# Altium PCB MyPCB1_lab11.PcbDoc
Units mm, origin at the board's own origin, x right, y up, seen from the top; angles counter-clockwise.
Board outline 184 x 67 mm, 6 copper layers (Top Layer, Layer 3, Layer 1, Layer 2, Layer 4, Bottom Layer), stack 1.612 mm thick; 50 components, 66 nets, 239 pads, 208 vias.
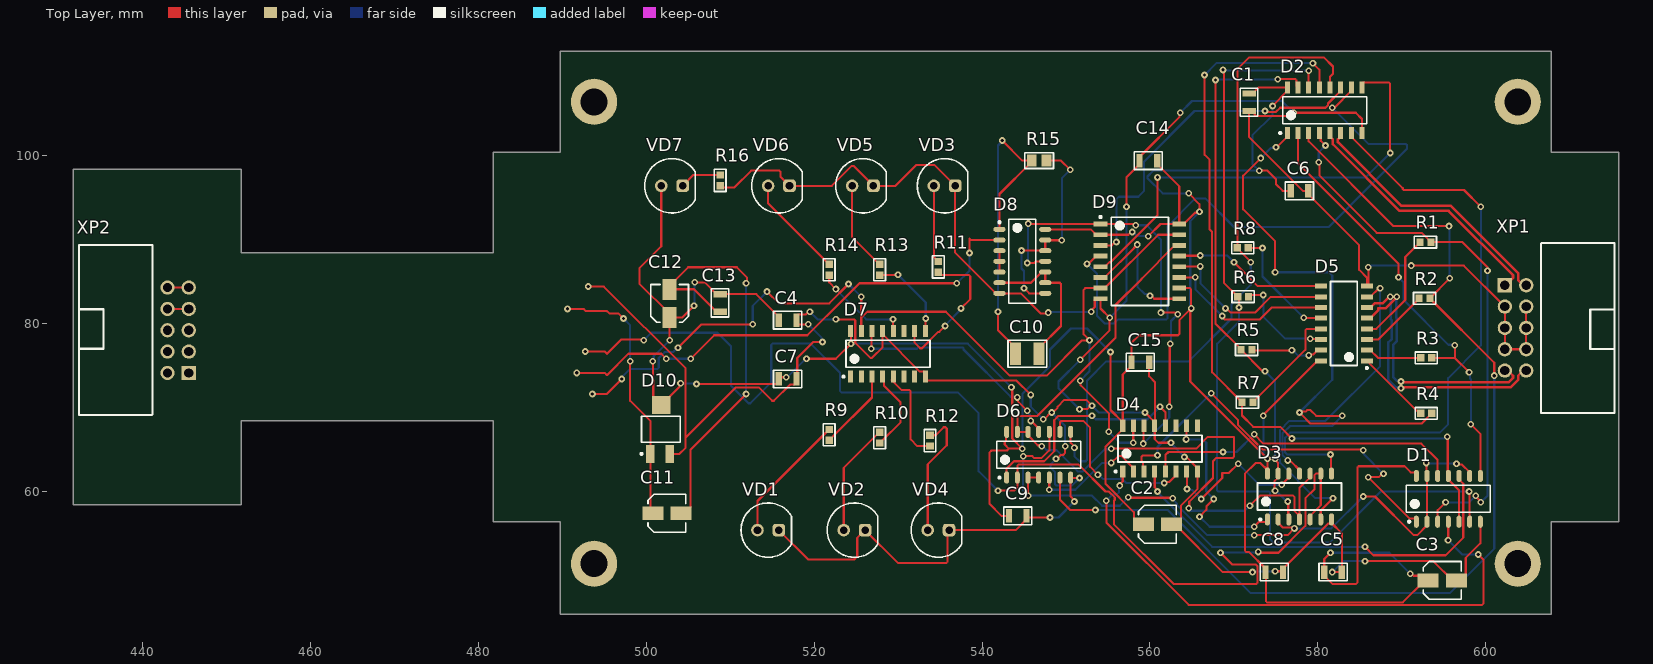
[diagram p0: Top Layer view]
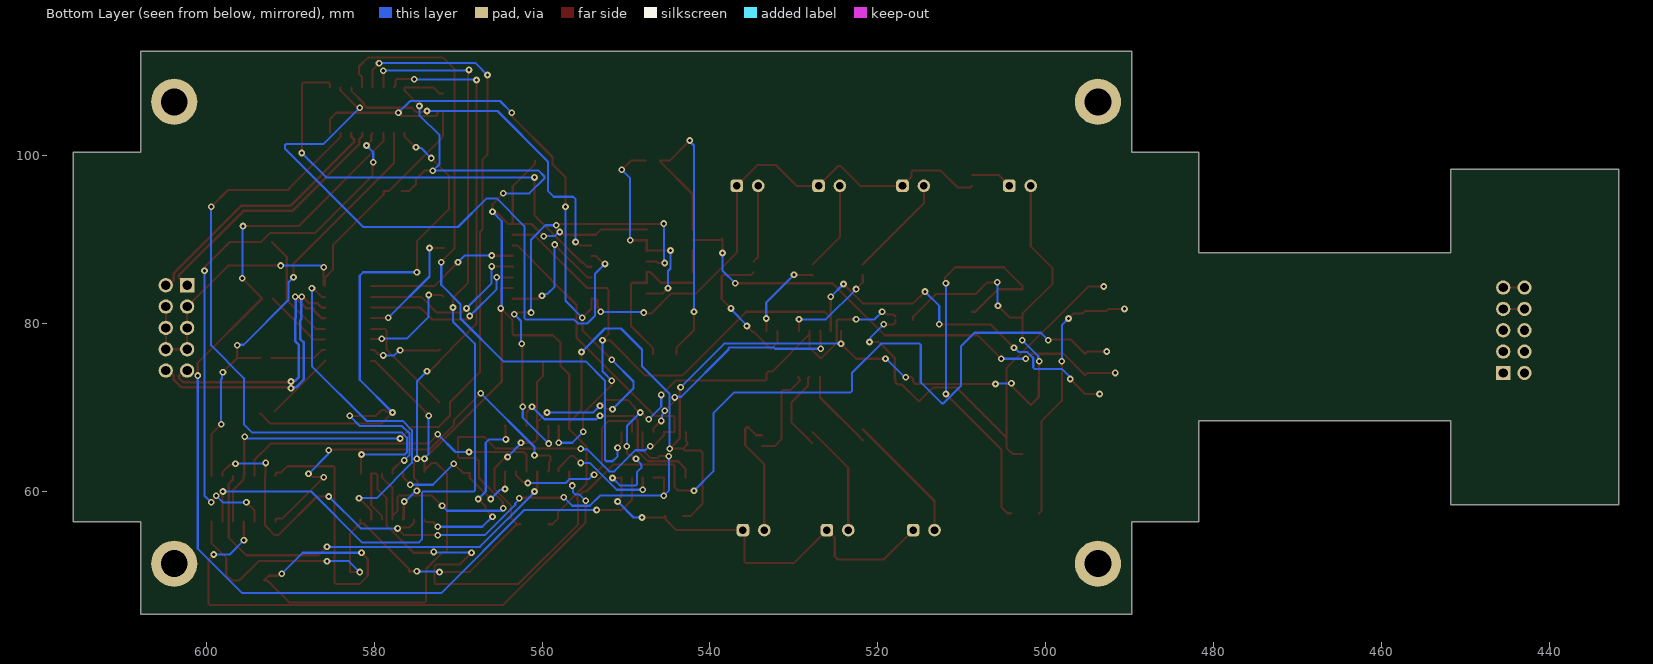
[diagram p1: Bottom Layer view, seen from below]
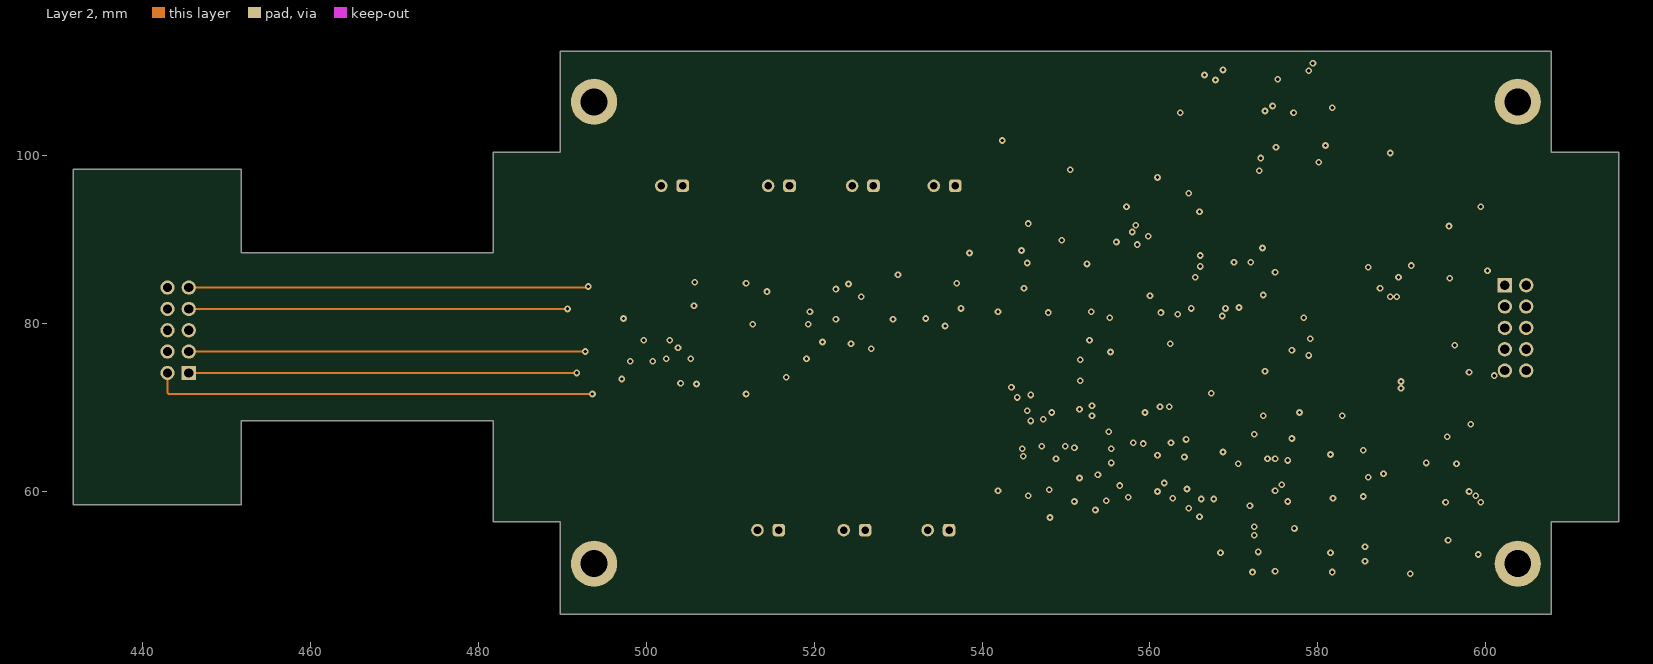
[diagram p2: Layer 2]
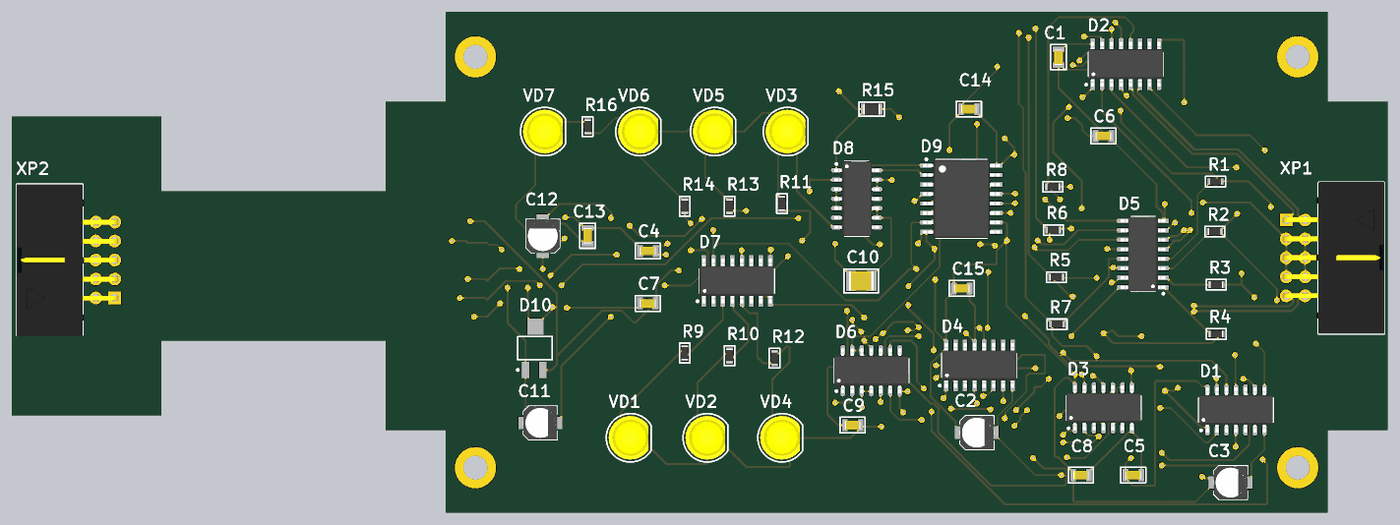
[diagram p3: 3D render of the assembled board from above, using the file's embedded part models]

## Layer stack, top to bottom
Top Solder: solder mask 0.0102, Solder Resist, Dk 3.5
Top Layer: signal copper 0.018
Dielectric 4: prepreg 0.508, PP-006, Dk 4.1
Layer 3: signal copper 0.018
Dielectric 6: prepreg 0.0711, PP-006, Dk 4.1
Dielectric 2: prepreg 0.0711, PP-006, Dk 4.1
Layer 1: signal copper 0.018
Dielectric 1: core 0.2032, Core-025, Dk 4.6
Layer 2: signal copper 0.018
Dielectric 3: prepreg 0.0711, PP-006, Dk 4.1
Dielectric 7: prepreg 0.0711, PP-006, Dk 4.1
Layer 4: signal copper 0.018
Dielectric 5: prepreg 0.508, PP-006, Dk 4.1
Bottom Layer: signal copper 0.018
Bottom Solder: solder mask 0.0102, Solder Resist, Dk 3.5

## Board outline
451.8,88.4 451.8,98.4 431.8,98.4 431.8,58.4 451.8,58.4 451.8,68.4 481.8,68.4 481.8,56.4 489.8,56.4 489.8,45.4 607.8,45.4 607.8,56.4 615.8,56.4 615.8,100.4 607.8,100.4 607.8,112.4 489.8,112.4 489.8,100.4 481.8,100.4 481.8,88.4
board region "Layer Stack Region 1": 481.8,68.4 451.8,68.4 451.8,88.4 481.8,88.4
board region "Layer Stack Region 1": 451.8,58.4 431.8,58.4 431.8,98.4 451.8,98.4
board region "Layer Stack Region 1": 481.8,100.4 489.8,100.4 489.8,112.4 607.8,112.4 607.8,100.4 615.8,100.4 615.8,56.4 607.8,56.4 607.8,45.4 489.8,45.4 489.8,56.4 481.8,56.4

## Design rules (kind name [scope] priority, off if disabled: settings)
Clearance [InNet('No Net')] p1: gap=0.2 ignorepadtopadclearanceinfootprint=FALSE
DiffPairsRouting [All] p1: maxlimit=0.4 minlimit=0.2 mostfreqgap=0.3 toplayer_minwidth=0.2 toplayer_maxwidth=0.381 toplayer_prefwidth=0.3 midlayer1_maxgap=0.254 midlayer1_minwidth=0.2 midlayer1_maxwidth=0.381 midlayer1_prefwidth=0.3 midlayer2_maxgap=0.254 midlayer2_minwidth=0.2 midlayer2_maxwidth=0.381 midlayer2_prefwidth=0.3 midlayer3_maxgap=0.254 midlayer3_minwidth=0.2 midlayer3_maxwidth=0.381 midlayer3_prefwidth=0.3 midlayer4_maxgap=0.254 midlayer4_minwidth=0.2 midlayer4_maxwidth=0.381 midlayer4_prefwidth=0.3 bottomlayer_minwidth=0.2 bottomlayer_maxwidth=0.381 bottomlayer_prefwidth=0.3 maxuncoupledlength=12.7
PolygonConnect [All] p1: connectstyle=Relief reliefconductorwidth=0.254 reliefentries=4 polygonreliefangle="90 Angle" airgapwidth=0.254
RoutingVias [All] p1: holewidth=0.4 width=0.8 viastyle="Through Hole" minholewidth=0.3 minwidth=0.6 maxholewidth=0.9 maxwidth=1.27
SolderMaskExpansion [All] p1: expansion=0.102
Width [All] p1: maxlimit=1 minlimit=0.2 preferedwidth=0.25
29 further rules are at their usual default settings.

## Classes and differential pairs
net class S[0..5]: S0 S1 S2 S3 S4 S5
net class ABC[0..7]: ABC0 ABC1 ABC2 ABC3 ABC4 ABC5 ABC6 ABC7
component class ivt33_kuznecov_list2_9var: C10 C11 C12 C13 C14 C15 D8 D9 D10 R15 R16 VD7 XP2
component class ivt33_kuznecov_list1_9var: C1 C2 C3 C4 C5 C6 C7 C8 C9 D1 D2 D5 D7 R1 R2 R3 R4 R5 R6 R7 R8 R9 R10 R11 R12 R13 R14 VD1 VD2 VD3 VD4 VD5 VD6 XP1
differential pair Out2: +Out2_P -Out2_N
differential pair Out1: +Out1_P -Out1_N

## Components (designator, comment, footprint, x,y, rotation, side; value= is the part's Value field where it differs from the comment)
C1 "" 0805_N 571.8,106.35 r90 top
C2 "*" CA010M0010REB-0405 560.875,56.1 r0 top
C3 "*" CA010M0010REB-0405 594.8,49.4 r0 top
C4 "" 0805_N 516.85,80.4 r180 top
C5 "" 0805_N 581.8,50.4 r0 top
C6 "" 0805_N 577.8,95.8 r180 top
C7 "" 0805_N 516.85,73.4 r180 top
C8 "" 0805_N 574.8,50.4 r0 top
C9 "" 0805_N 544.25,57.1 r180 top
C10 "1210" K10-79_3.2_2.5(1210) 545.4,76.4 r0 top
C11 "*" CA010M0010REB-0405 502.475,57.4 r0 top
C12 "*" CA010M0010REB-0405 502.8,82.4 r90 top
C13 "" 0805_N 508.8,82.45 r90 top
C14 "" 0805_N 559.8,99.4 r0 top
C15 "" 0805_N 558.85,75.4 r180 top
D1 "74AC00SC" SO14-N 595.53,59.125 r90 top
D2 "SOIC-16" SO16-N 580.8,105.4 r90 top
D3 "74AC00SC" SO14-N 577.8,59.4 r90 top
D4 "SOIC-16" SO16-N 561.2,65.1 r90 top
D5 "SOIC-16" SO16-N 583.1,80 r180 top
D6 "74AC00SC" SO14-N 546.74,64.375 r90 top
D7 "SOIC-16" SO16-N 528.8,76.4 r90 top
D8 "74AC00SC" SO14-N 544.8,87.4 r0 top
D9 "MC14520BDWG \"Motorola\"" SOIC-16W-N 558.8,87.4 r0 top
D10 "LM1117DTX" LM1117DTX 502.8,67.4 r90 top
R1 "Р1-12-0,1 * 5%-M-\"A\" АЛЯР.434110.005 ТУ" RES_0603_1608_N 592.8,89.7 r180 top
R2 "Р1-12-0,1 * 5%-M-\"A\" АЛЯР.434110.005 ТУ" RES_0603_1608_N 592.7,83 r180 top
R3 "Р1-12-0,1 * 5%-M-\"A\" АЛЯР.434110.005 ТУ" RES_0603_1608_N 592.9,75.9 r180 top
R4 "Р1-12-0,1 * 5%-M-\"A\" АЛЯР.434110.005 ТУ" RES_0603_1608_N 592.9,69.3 r180 top
R5 "Р1-12-0,1 * 5%-M-\"A\" АЛЯР.434110.005 ТУ" RES_0603_1608_N 571.5,76.9 r0 top
R6 "Р1-12-0,1 * 5%-M-\"A\" АЛЯР.434110.005 ТУ" RES_0603_1608_N 571.1,83.2 r0 top
R7 "Р1-12-0,1 * 5%-M-\"A\" АЛЯР.434110.005 ТУ" RES_0603_1608_N 571.6,70.6 r0 top
R8 "Р1-12-0,1 * 5%-M-\"A\" АЛЯР.434110.005 ТУ" RES_0603_1608_N 571.05,89 r0 top
R9 "Р1-12-0,1 * 5%-M-\"A\" АЛЯР.434110.005 ТУ" RES_0603_1608_N 521.8,66.75 r90 top
R10 "Р1-12-0,1 * 5%-M-\"A\" АЛЯР.434110.005 ТУ" RES_0603_1608_N 527.8,66.4 r90 top
R11 "Р1-12-0,1 * 5%-M-\"A\" АЛЯР.434110.005 ТУ" RES_0603_1608_N 534.8,86.75 r90 top
R12 "Р1-12-0,1 * 5%-M-\"A\" АЛЯР.434110.005 ТУ" RES_0603_1608_N 533.8,66.05 r90 top
R13 "Р1-12-0,1 * 5%-M-\"A\" АЛЯР.434110.005 ТУ" RES_0603_1608_N 527.8,86.4 r90 top
R14 "Р1-12-0,1 * 5%-M-\"A\" АЛЯР.434110.005 ТУ" RES_0603_1608_N 521.8,86.4 r90 top
R15 "0805" RES_0805_2012_N 546.8,99.4 r0 top
R16 "Р1-12-0,1 * 5%-M-\"A\" АЛЯР.434110.005 ТУ" RES_0603_1608_N 508.8,97.05 r90 top
VD1 "*" LED_5mm 514.53,55.4 r0 top
VD2 "*" LED_5mm 524.8,55.4 r0 top
VD3 "*" LED_5mm 535.53,96.4 r0 top
VD4 "*" LED_5mm 534.8,55.4 r0 top
VD5 "*" LED_5mm 525.8,96.4 r0 top
VD6 "*" LED_5mm 515.8,96.4 r0 top
VD7 "*" LED_5mm 503.07,96.4 r0 top
XP1 "TE_1-1634689-0" BH-10R 603.53,79.48 r180 top
XP2 "TE_1-1634689-0" BH-10R 444.27,79.2 r0 top

## Footprints (in the part's own frame and the unit in brackets; to place one, negate y for a bottom-side part, rotate by r counter-clockwise, add the part's x,y. Pads: shape width x height; smd on the part's side, far side on the other; paste and mask are expansions set on the pad)
0805_N [mm] "Резистор, конденсатор"
  rect 0.75x1.6 smd: 1(-1.05,0) 2(1.05,0)
  silkscreen extent -1.68,-1.05 1.68,1.05, body extent -1.05,-0.58 1.05,0.58, height 1
BH-10R [mm] "Разъем угловой 2х5х2,54 типа ВН"
  rect 1.7x1.7 hole 1.1: 1(1.27,-5.08)
  round 1.7 hole 1.1: 2(-1.27,-5.08) 3(1.27,-2.54) 4(-1.27,-2.54) 5(1.27,0) 6(-1.27,0) 7(1.27,2.54) 8(-1.27,2.54) 9(1.27,5.08) 10(-1.27,5.08)
  silkscreen extent -11.8,-10.1 -3.05,10.15, body extent -11.85,-10.2 1.65,10.15, height 9.13
CA010M0010REB-0405 [mm] "Aluminum Electrolytic Capacitor, Body 4,30x4,30x6,30mm, IPC Medium Density"
  rect 2.5x1.65 smd: +(-1.675,0) -(1.675,0)
  silkscreen extent -2.25,-2.25 2.25,2.25, body extent -2.3,-2.25 2.3,2.25, height 6.3
K10-79_3.2_2.5(1210) [mm]
  rect 1.3x2.7 smd: 1(-1.4,0) 2(1.4,0)
  silkscreen extent -2.3,-1.6 2.3,1.6, body extent -1.65,-1.3 1.65,1.3, height 1.75
LED_5mm [mm]
  round 1.5 hole 0.9: A(-1.27,0)
  rrect50% 1.5x1.5 hole 0.9: C(1.27,0)
  silkscreen extent -3.24,-3.24 2.78,3.24, body extent -2.92,-2.92 2.41,2.92, height 10.71
LM1117DTX [mm] "SOT223, 4-Leads, Body 6,50x7,00mm (avg), Pitch 2,30mm, IPC Medium Density"
  rect 2.15x1 smd: 1(-2.925,2.3) 3(-2.925,0)
  rect 2.15x2.15 smd: 4(2.9,1)
  silkscreen extent -3.05,-1.27 1.55,3.47, body extent -1.85,-1.27 1.85,3.35, height 1.8
RES_0603_1608_N [mm] "Chip Resistor, 2-Leads, Body 1,60x0,80mm, IPC Medium Density"
  rect 0.85x0.9 smd: 1(-0.65,0) 2(0.65,0)
  silkscreen extent -1.33,-0.7 1.33,0.7, body extent -0.87,-0.45 0.87,0.45, height 0.55
RES_0805_2012_N [mm] "Rezistor 0805"
  rect 1.15x1.4 smd: 1(-0.875,0) 2(0.875,0)
  silkscreen extent -1.7,-0.95 1.7,0.95, body extent -1.1,-0.7 1.1,0.7, height 0.6
SO14-N [mm]
  oval 1.45x0.6 smd: 1(-2.725,3.81) 2(-2.725,2.54) 3(-2.725,1.27) 4(-2.725,0) 5(-2.725,-1.27) 6(-2.725,-2.54) 7(-2.725,-3.81) 8(2.725,-3.81) 9(2.725,-2.54) 10(2.725,-1.27) 11(2.725,0) 12(2.725,1.27) 13(2.725,2.54) 14(2.725,3.81)
  silkscreen extent -2.85,-5 1.6,5, body extent -3,-5 3,5, height 1.45
SO16-N [mm] "SOIC, 16-Leads, Body 9,90x3,90mm, Pitch 1,27mm, IPC Medium Density"
  rect 1.45x0.6 smd: 1(-2.725,4.445) 2(-2.725,3.175) 3(-2.725,1.905) 4(-2.725,0.635) 5(-2.725,-0.635) 6(-2.725,-1.905) 7(-2.725,-3.175) 8(-2.725,-4.445) 9(2.725,-4.445) 10(2.725,-3.175) 11(2.725,-1.905) 12(2.725,-0.635) 13(2.725,0.635) 14(2.725,1.905) 15(2.725,3.175) 16(2.725,4.445)
  silkscreen extent -2.85,-5 1.6,5.42, body extent -3,-5 3,5, height 1.45
SOIC-16W-N [mm] "SOIC, 16-Leads, Body 10,30x7,50mm, Pitch 1,27mm, IPC Medium Density"
  rect 1.62x0.58 smd: 1(-4.69,4.445) 2(-4.69,3.175) 3(-4.69,1.905) 4(-4.69,0.635) 5(-4.69,-0.635) 6(-4.69,-1.905) 7(-4.69,-3.175) 8(-4.69,-4.445) 9(4.69,-4.445) 10(4.69,-3.175) 11(4.69,-1.905) 12(4.69,-0.635) 13(4.69,0.635) 14(4.69,1.905) 15(4.69,3.175) 16(4.69,4.445)
  silkscreen extent -4.81,-5.25 3.4,5.41, body extent -5.15,-5.25 5.15,5.25, height 2.65

## Part data
C1 C4 C5 C6 C7 C8 C9 C13 C14 C15: library part К10-79_0805_Н90, "Чип конденсатор 0805 Н90 ряд Е6", Case=0805, Manufacturer="ООО \"Кулон\"", Tolerance=+80%-20%, BOM="К10-79-*-B-*+80%-20%-Н90 АЖЯР.673511.004 ТУ", Created_by=Желобаев, Issue_date=19_12_2018, Name=К10-79, Name2="Конденсатор К10-79", TKE=Н90, TU="АЖЯР.673511.004 ТУ", Type=K10-79, Version=0, Weight=0.05
C2 C3 C11 C12: library part CA010M0010REB-0405, "Электролитический SND"
C10: library part К10-79_1210_Н30, "Чип конденсатор 1210 Н30 ряд Е6", Manufacturer="ООО \"Кулон\"", Tolerance=±20%, BOM="Конденсатор К10-79-*-B-*±20%-Н30 АЖЯР.673511.004 ТУ", Datum=19_12_2018, HelpURL=\\papa\Info\Altium_Library\Даташиты_и_ТУ\Конденсаторы_отечественные\К10-79_АЖЯР_673511_004ТУ.pdf, Hight=1.75, LibraryEngeneer=Желобаев, LiveStatus=производится, Name="Конденсатор К10-79", Packing=катушка, Permit MPSU=разрешен, Reliability=0.000005, Size=1210, TKE=Н30, TU="АЖЯР.673511.004 ТУ", Type=K10-79, Version=00, Weight=0.2
D1 D3 D6 D8: "4 элемента 2И-НЕ TTL SOIC-14", Case=SOIC-14, Manufacturer="ON Semiconductor", Power_Voltage="4.5 - 5.5 V", BOM="74AC00SC \"ON Semiconductor\"", Created_by=Желобаев, Issue_date=10.04.2019, Name=74AC00SC, Name2="Микросхема 74AC00SC", Version=0
D2 D5: library part 74HCT151D, "мультиплексор 8 канальный TTL", Manufacturer="NXP Semiconductors", Power_Voltage="4.5 -5.5 V", BOM="74HCT151D \"NXP Semiconductors\"", Case=SOIC-16, Created_by=Желобаев, Issue_date=05.04.2019, Name=74HCT151D, Name2="Микросхема 74HCT151D", Version=0
D4 D7: library part HCF4017BM1, "Декадный счетчик c 10 декодированными выходами", Manufacturer=STMicroelectronics, Power_Voltage="-0.5 -22 V", BOM="HCF4017BM1 \"STMicroelectronics\"", Case=SOIC-16, Created_by=Желобаев, Issue_date=05.04.2019, Name=HCF4017BM1, Name2="Микросхема HCF4017BM1", Version=0
D9: library part MC14520BDWG, "Два двоичных счетчика", Case=SOIC-16, Manufacturer=Motorola, BOM="MC14520BDWG \"Motorola\"", Created_by=Желобаев, Issue_date=6.01.2019, Name=MC14520BDWG, Name2="Микросхема MC14520BDWG", Version=0
R1 R2 R3 R4 R5 R6 R7 R8 R9 R10 R11 R12 R13 R14 R16: library part Р1-12-0,1-5%, "Резистор от 0,75 Ом до 10 МОм", Case=0603, Manufacturer="ОАО \"НПО \"Эркон\"", Tolerance=5%, Voltage=50, BOM="Р1-12-0,1 * 5%-M-\"A\" АЛЯР.434110.005 ТУ", Created_by=Желобаев, Issue_date=10.04.2019, Name=Р1-12-0,1, Name2="Резистор Р1-12-0,1", Size=0603, TKR=M, TU="АЛЯР.434110.005 ТУ", Type="Р1-12-0,1±5%-М-\"А\"", Version=00, Weight=0,005
R15: library part Р1-12-0,125-5%, "Резистор от 0,75 Ом до 2 МОм", Manufacturer="ОАО \"НПО \"Эркон\"", Tolerance=5%, Voltage=150, BOM="Р1-12-0,125 * 5%-M-\"A\" АЛЯР.434110.005 ТУ", Case=0805, Created_by=Желобаев, Issue_date=05_12_2018, Name=Р1-12-0,125, Name2="Резистор Р1-12-0,125", Size=0805, TKR=M, TU="АЛЯР.434110.005 ТУ", Type="Р1-12-0,125±5%-М-\"А\"", Version=00, Weight=0,01
VD1 VD2 VD3 VD4 VD5 VD6 VD7: library part 521-9466, "Светодиод,5мм,жёлтый", Manufacture=Dialight, BOM="521-9466 \"Dialight\"", Name=521-9466
XP1 XP2: "Вилка типа BH-10R угловая правая двухрядная 2х5х2.54", Case=BH-10R, Manufacturer="TE Connectivity", BOM="TE_1-1634689-0 \"TE Connectivity\"", Created_by=Желобаев, Issue_date=13.05.2019, Name=TE_1-1634689-0, Name2="Вилка угловая TE_1-1634689-0", Version=0

## Free pads (board coordinates)
  round 5.5 hole 3.2: M1(493.8,106.4) M2(603.8,106.4) M3(603.8,51.4) M4(493.8,51.4)

## Via types
v1: diameter 0.8, hole 0.4, Top Layer to Bottom Layer, 208 vias

## Nets (pads, with @x,y where several pads share a name; then routed paths per layer and width w, separated by ;. In a path a pad name is that pad's centre, name@x,y a point inside that pad or via, vN(x,y) a via of type N, cw(c..) or ccw(c..) an arc to the next point about the centre after c; other vN are vias at no path point)
+5V: C1.2 C2.+ C3.+ C4.2 C5.1 C6.2 C7.2 C8.1 C9.2 C12.+ C13.2 C14.2 C15.2 D1.14 D2.16 D3.14 D4.16 D5.16 D6.14 D7.16 D8.14 D9.2 D9.10 D9.16 D10.4 VD7.A | length 395.8
  Top Layer w0.25: v1(500.8,75.5) 500.8,73.273 500.85,73.223 500.85,71.25 D10.4 503.995,72.495 503.995,72.795 v1(504.1,72.9) ; VD7.A 501.8,89.2 499.2,86.6 499.2,84.75 502.8,81.15 C12.+ ; v1(502.8,78) C12.+ ; v1(505.7,82.1) 504.325,80.725 C12.+ ; v1(505.8,84.9) 506.975,84.9 508.375,83.5 C13.2 513.125,83.5 515.8,80.825 C4.2 ; v1(506,72.8) 515.55,72.8 515.8,73.05 C7.2 516,73.6 v1(516.7,73.6) ; v1(519.1,75.8) 522.6,75.8 v1(524.4,77.6) 524.378,77.622 524.378,79.102 D7.16 ; D6.14 542.863,67.033 542.863,66.013 542.7,65.85 542.7,65.6 543.2,65.1 ; C9.2 542.3,57.1 540.9,58.5 540.9,64.654 541.123,64.877 542.977,64.877 543.2,65.1 ; v1(543.5,72.4) 543.6,72.3 543.6,66.3 v1(544.8,65.1) 543.2,65.1 ; D8.14 552.955,91.21 553.59,90.575 D9.2 557.426,90.575 557.751,90.9 v1(557.9,90.9) ; v1(555.3,76.6) 555.3,69.705 D4.16@556.755,68.25 ; C2.+ 558.775,56.1 558.075,56.8 558.075,57.525 554.7,60.9 554.7,65.345 556.755,67.4 D4.16 D4.16@556.755,68.25 ; v1(559.8,90.4) 561.245,91.845 D9.16 ; C14.2 560.85,98.975 563.49,96.335 D9.16 ; D9.10 563.502,84.213 564.754,84.213 564.9,84.066 v1(564.9,81.8) v1@564.8,81.7 ; v1(564.6,95.5) 565.876,94.224 565.876,93.324 v1(565.9,93.3) 565.795,93.195 565.36,93.195 564.01,91.845 D9.16 ; C1.2 572.225,107.4 572.95,108.125 D2.16 576.355,107.7 574.6,105.945 v1(574.6,105.9) ; v1(573,98.2) 574,98.2 575.003,97.197 575.003,96.597 575.8,95.8 C6.2 ; v1(573.5,69) 573.5,69.105 579.95,75.555 D5.16 ; D3.14@573.99,62.55 573.144,63.396 572.596,63.396 571.3,62.1 571.3,52.946 571.446,52.8 571.775,52.8 573.75,50.825 C8.1 573.8,50.35 573.8,46.946 573.946,46.8 590.1,46.8 592.7,49.4 C3.+ 592.561,49.964 591.385,49.964 591.149,50.2 v1(591,50.2) ; D3.14@573.995,62.342 573.995,63.895 v1(574,63.9) 564.8,73.1 v1@564.8,81.7 ; v1(581.5,52.7) 580.75,51.95 C5.1 580.75,49.975 581.725,49 584.554,49 584.7,49.146 584.7,62.854 584.846,63 590.323,63 591.045,62.278 591.558,62.278 591.72,62.117 D1.14 ; D4.16@556.755,68.25 556.755,73.93 557.8,74.975 C15.2 557.8,77.7 558.7,78.6 563.354,78.6 563.5,78.746 563.5,80.4 v1@564.8,81.7
  Bottom Layer w0.25: v1(500.8,75.5) 500.905,75.605 500.905,76.105 v1(502.8,78) ; v1(504.1,72.9) 504.15,72.85 505.95,72.85 v1(506,72.8) ; v1(505.7,82.1) 505.75,82.15 505.75,84.85 v1(505.8,84.9) ; v1(516.7,73.6) 516.8,73.6 519,75.8 v1(519.1,75.8) ; v1(524.4,77.6) 538.3,77.6 v1(543.5,72.4) ; v1(544.8,65.1) 544.8,71.6 548.1,74.9 548.1,76.9 550.6,79.4 552.5,79.4 v1(555.3,76.6) ; v1(557.9,90.9) 557.996,90.9 558.496,90.4 v1(559.8,90.4) ; v1(564.6,95.5) 561.5,95.5 559.704,97.296 559.704,97.504 560.4,98.2 v1(573,98.2) 572.2,99 572.2,102.4 574.6,104.8 v1(574.6,105.9) ; v1(564.9,81.8) 564.8,81.9 564.8,92.2 v1(565.9,93.3) ; v1(573.5,69) 573.5,64.496 574,63.996 v1(574,63.9) ; v1(581.5,52.7) 588.5,52.7 v1(591,50.2)
ABC0: D1.3 D2.4 R1.1 | length 66.3
  Top Layer w0.25: v1(580.1,99.2) 580.165,99.135 580.165,97.635 587,90.8 592.35,90.8 593.125,90.025 593.15,90.025 593.45,89.725 R1.1 597.2,89.7 600.2,86.7 v1(600.2,86.3) ; D2.4 580.34,102.5 580.34,101.76 v1(580.9,101.2) ; D1.3 594.26,57.76 v1(595.2,58.7) ; v1(598.8,59.5) 598.8,59.4 599.4,58.8 v1(599.4,58.7)
  Bottom Layer w0.25: v1(580.1,99.2) 580.1,100.4 v1(580.9,101.2) ; v1(595.2,58.7) 598,58.7 v1(598.8,59.5) ; v1(599.4,58.7) 600.2,59.5 v1(600.2,86.3)
ABC1: D2.3 D6.6 R2.1 | length 125.6
  Top Layer w0.25: D6.6 549.28,59.02 550.5,57.8 v1(553.5,57.8) ; D2.3 578.895,101.705 589,91.6 v1(595.6,91.6) ; v1(595.7,85.4) 595.7,85.375 593.35,83.025 R2.1 593.35,82.975 601,75.325 v1(601,73.8)
  Bottom Layer w0.25: v1(553.5,57.8) 562.1,57.8 572,47.9 595.7,47.9 601,53.2 v1(601,73.8) ; v1(595.6,91.6) 595.65,91.55 595.65,85.45 v1(595.7,85.4)
ABC2: D1.8 D2.2 R3.1 | length 53
  Top Layer w0.25: D2.2 577.625,99.075 589.6,87.1 v1(589.6,85.5) ; R3.1 593.57,75.88 596.32,75.88 v1(598,74.2) ; 596.3,75.905 v1(596.3,77.4) ; v1(598.2,68) 599.34,66.86 D1.8
  Bottom Layer w0.25: v1(589.6,85.5) 589.6,85.479 590.2,84.879 590.2,82.8 595.525,77.475 596.225,77.475 v1(596.3,77.4) ; v1(598,74.2) 598.105,74.095 598.105,73.445 598.25,73.3 598.25,68.05 v1(598.2,68)
ABC3: D2.1 D3.11 R4.1 | length 81.6
  Top Layer w0.25: v1(573.2,99.7) 571.1,97.6 571.1,93.6 574.9,89.8 v1(574.9,86.1) ; v1(575,101) 575.105,101 576.355,102.25 D2.1 ; v1(576.4,63.7) 576.505,63.595 576.755,63.595 577.8,62.55 D3.11 ; v1(582.9,69) 579.8,69 579.1,69.7 578.749,69.7 578.554,69.505 577.905,69.505 v1(577.8,69.4) 577.956,69.244 579.1,68.1 592.35,68.1 R4.1
  Bottom Layer w0.25: v1(573.2,99.7) 574.395,100.895 574.895,100.895 v1(575,101) ; v1(574.9,86.1) 581.3,86.1 581.7,85.7 581.7,73.3 v1(577.8,69.4) ; v1(576.4,63.7) 575.8,64.3 575.8,66.954 575.946,67.1 576,67.1 576.7,67.8 581.7,67.8 v1(582.9,69)
ABC4: D2.15 D3.3 D3.13 R5.1 | length 67.7
  Top Layer w0.25: v1(567.8,109) 567.8,79.975 570.85,76.925 R5.1 570.85,76.875 573.32,74.405 573.595,74.405 v1(573.7,74.3) ; v1(574.9,60.1) 574.805,60.195 574.805,61.2 575.26,61.655 D3.13 575.26,63.391 574.9,63.751 v1(574.9,63.9) ; v1(575.2,109.1) 577.3,109.1 577.45,108.95 577.45,108.3 D2.15 ; v1(576.4,58.8) 576.465,58.735 576.465,56.74 D3.3 D3.3@576.53,57.1
  Bottom Layer w0.25: v1(567.8,109) 567.85,109.05 575.15,109.05 v1(575.2,109.1) ; v1(573.7,74.3) 574.9,73.1 v1(574.9,63.9) ; v1(574.9,60.1) 575,60.1 576.3,58.8 v1(576.4,58.8)
ABC5: D1.6 D2.14 R6.1 | length 106.1
  Top Layer w0.25: v1(568.7,110.2) 568.8,110.1 568.8,84.875 570.45,83.225 R6.1 570.6,83.05 v1(570.6,81.9) ; D2.14 578.897,108.127 578.897,110.097 v1(578.9,110.1) ; v1(598,60) 598.035,59.965 598.035,56.435 D1.6
  Bottom Layer w0.25: v1(568.7,110.2) 568.75,110.15 578.85,110.15 v1(578.9,110.1) ; v1(570.6,81.9) 570.6,80.2 568,77.6 568,60.146 568.146,60 574.154,60 574.3,59.854 574.3,54.3 574.7,53.9 581.4,53.9 587.5,60 v1(598,60)
ABC6: D1.5 D1.11 D2.13 R7.1 | length 95.4
  Top Layer w0.25: v1(566.5,109.6) 566.5,100.1 567.1,99.5 567.1,91.2 567.4,90.9 567.4,74.175 570.95,70.625 R7.1 570.95,69.05 572.3,67.7 575.5,67.7 v1(576.9,66.3) ; v1(579.4,111) 580.165,110.235 D2.13 ; v1(595.4,66.5) 595.465,66.435 595.465,61.915 D1.11 595.53,61.425 596.8,60.155 D1.5
  Bottom Layer w0.25: v1(566.5,109.6) 567.9,111 v1(579.4,111) ; v1(576.9,66.3) 595.051,66.3 595.251,66.5 v1(595.4,66.5)
ABC7: D2.12 D6.8 R8.1 | length 81
  Top Layer w0.25: D6.8 550.55,65.799 551,65.349 v1(551,65.2) ; v1(572,87.3) 572,87.375 570.4,88.975 R8.1 570.4,110.3 571.8,111.7 580.7,111.7 581.8,110.6 581.8,109.758 581.435,109.393 D2.12
  Bottom Layer w0.25: v1(551,65.2) 551,64.201 551.601,63.6 552.354,63.6 552.5,63.746 552.5,73.2 554.8,75.5 564.6,75.5 569.7,80.6 569.7,82.3 572,84.6 v1(572,87.3)
GND: C1.1 C2.- C3.- C4.1 C5.2 C6.1 C7.1 C8.2 C9.1 C14.1 C15.1 D1.7 D2.8 D3.7 D4.8 D4.13 D5.8 D6.7 D7.8 D7.13 D8.7 D9.8 D10.3 R16.1 VD1.C VD2.C VD3.C VD4.C VD5.C VD6.C XP1.3 XP1.4 XP1.5 XP1.6 XP1.7 XP1.8 XP2.9 XP2.10 | length 508.9
  Top Layer w0.25: XP2.10 XP2.9 XP2.9@445.8,84.02 ; v1(493.1,84.4) 494.96,84.4 504.7,74.66 504.7,66.5 ; D10.3 503.975,64.475 504.7,65.2 504.7,66.5 ; R16.1 509,96.2 510.5,96.2 512.5,98.2 515.854,98.2 516,98.054 516,97.47 VD6.C 522.1,96.4 524.481,98.781 524.689,98.781 VD5.C 529.7,96.4 532.2,98.9 534.3,98.9 VD3.C 536.8,88.44 541.65,83.59 D8.7 544.61,83.59 547,81.2 547.8,81.2 v1(547.9,81.3) ; VD1.C 519.3,51.9 524.754,51.9 525.143,52.289 525.143,54.473 VD2.C 529.97,51.5 535.754,51.5 535.9,51.646 535.9,55.23 VD4.C 544.025,55.4 545.3,56.675 C9.1 545.5,56.9 v1(548.1,56.9) ; C4.1 517.9,80.15 518.15,79.9 v1(519.3,79.9) ; C4.1@517.913,80.838 518.15,81.075 519.026,81.075 519.351,81.4 v1(519.5,81.4) ; v1(521,77.8) 519.9,77.8 518,75.9 518,73.5 C7.1 517.9,72.975 517.65,72.725 517.125,72.725 515.204,70.804 514.996,70.804 513.4,72.4 510.7,72.4 504.8,66.5 504.7,66.5 ; v1(522.6,80.5) 524.754,80.5 524.9,80.354 524.9,77.7 526.696,75.904 526.904,75.904 528.165,77.165 D7.13@528.165,78.7 ; D7.13 D7.13@528.165,78.7 ; v1(545.8,71.5) 544.1,73.2 533.42,73.2 533.245,73.375 D7.8 533.245,74.1 533.07,74.275 532.59,74.275 D7.13@528.165,78.7 ; v1(547.3,68.6) 547.4,68.6 v1@548.2,69.4 ; v1@548.432,69.4 549.003,69.97 549.003,70.103 549.8,70.9 552.4,70.9 v1(553.1,70.2) 552.951,70.2 552.551,69.8 v1(551.6,69.8) ; v1(548.8,63.9) 548.949,63.9 549.385,64.336 549.636,64.336 549.9,64.6 v1(549.9,65.4) ; v1(551,58.8) 551,58.949 550.55,59.399 D6.7 550.6,61.6 v1(551.6,61.6) ; v1(551.7,75.7) 555.2,79.2 v1(555.2,80.7) 554.11,81.79 D9.8 553.59,82.955 553.425,82.79 553.425,81.974 553,81.549 v1(553,81.4) ; v1(557.2,93.9) 557.2,97.425 558.75,98.975 C14.1 558.75,99.825 563.495,104.57 563.495,104.995 v1(563.6,105.1) ; v1(559.4,69.4) 559.415,69.4 560.565,68.25 D4.13 ; C15.1 559.9,73.7 560.6,73 560.6,67.86 D4.13 ; v1(562.5,65.8) 561,65.8 560.565,66.235 D4.13 ; C2.- C2.-@562.975,56.1 ; v1@564.45,63.995 565.645,62.8 D4.8 565.645,60.273 563.675,58.303 563.675,56.8 C2.-@562.975,56.1 ; v1(572.2,50.4) 568.675,50.4 C2.-@562.975,56.1 ; v1(574.9,50.5) 575.75,50.5 C8.2 575.85,50.825 581.208,56.183 581.448,56.183 D3.7@581.61,56.345 ; D3.7 D3.7@581.61,56.345 ; v1(581.7,50.4) C5.2 582.85,55.01 581.61,56.25 D3.7@581.61,56.345 ; D2.8 585.245,104.355 584.5,105.1 577.079,105.1 576.679,104.7 572.621,104.7 572.475,104.846 572.475,105.05 572.225,105.3 C1.1 571.8,102.2 578.2,95.8 C6.1 578.85,95.375 584.9,89.325 584.9,86.4 585.825,85.475 D5.8 586,84.62 v1(586,86.7) ; v1(585.6,51.7) 593.75,51.7 596.05,49.4 C3.- 596.9,49.4 597.6,50.1 597.6,52.087 599.34,53.827 D1.7 ; v1(591.1,86.9) 597.38,86.9 XP1.3 XP1.5 XP1.7 XP1.8 XP1.6 XP1.4
  Layer 2 w0.25: XP2.9 492.98,84.28 v1(493.1,84.4)
  Bottom Layer w0.25: v1(519.3,79.9) 520.895,78.305 520.895,77.905 v1(521,77.8) ; v1(519.5,81.4) 520.4,80.5 v1(522.6,80.5) ; v1(545.8,71.5) 545.8,70.1 v1(547.3,68.6) ; v1(547.9,81.3) 547.95,81.35 552.95,81.35 v1(553,81.4) ; v1(548.1,56.9) 549.1,56.9 v1(551,58.8) ; v1(548.3,69.4) 549.9,67.8 v1(549.9,65.4) ; v1(548.8,63.9) 548.8,63.838 548.195,63.232 548.195,63.095 548.175,63.075 548.175,62.825 548.7,62.3 548.7,60.846 548.846,60.7 550.7,60.7 v1(551.6,61.6) ; v1(551.6,69.8) 549.1,72.3 549.1,73.1 v1(551.7,75.7) ; v1(553.1,70.2) 553.9,69.4 v1(559.4,69.4) ; v1(555.2,80.7) 557.2,82.7 v1(557.2,93.9) ; v1(562.5,65.8) 562.5,65.75 564.1,64.15 v1(564.1,64.1) ; v1(563.6,105.1) 565,106.5 575.7,106.5 v1(577.1,105.1) ; v1(572.2,50.4) 572.25,50.45 574.85,50.45 v1(574.9,50.5) ; v1(581.7,50.4) 583,51.7 v1(585.6,51.7) ; 586.349,86.9 v1(591.1,86.9)
NetC10_1: C10.1 D8.1 R15.1 | length 40.8
  Top Layer w0.25: v1(541.9,81.4) 541.9,79.2 544,77.1 C10.1 ; D8.1 542.075,95.425 545.925,99.275 R15.1 544.8,99.4 v1(542.4,101.8)
  Bottom Layer w0.25: v1(541.9,81.4) 541.9,101.204 542.4,101.704 v1(542.4,101.8)
NetC10_2: C10.2 D8.6 D8.9 D8.10 | length 18.6
  Top Layer w0.25: D8.6 545.83,84.86 547.1,86.13 D8.10 D8.9 549.254,84.86 549.4,84.714 549.4,79.7 546.8,77.1 C10.2
NetC11_+: C11.+ D10.1 XP2.7 XP2.8 | length 79.4
  Top Layer w0.25: XP2.8 XP2.7 ; v1(490.64,81.74) 492.54,81.74 492.8,81.48 495.34,81.48 495.617,81.203 496.697,81.203 v1(497.3,80.6) ; v1(498.1,75.5) 498.1,70.8 500.5,68.4 D10.1 500.5,57.7 C11.+
  Layer 2 w0.25: XP2.7 v1(490.64,81.74)
  Bottom Layer w0.25: v1(497.3,80.6) 498.1,79.8 v1(498.1,75.5)
NetC11_-: C11.- C12.- C13.1 | length 49.7
  Top Layer w0.25: C11.- 504.575,57.4 505.275,58.1 505.275,64.975 v1(511.9,71.6) ; C13.1 508.375,81.4 505.7,84.075 C12.- 502.8,84.5 505,86.7 510.8,86.7 511.996,85.504 511.996,84.896 v1(511.9,84.8)
  Bottom Layer w0.25: v1(511.9,71.6) v1(511.9,84.8)
NetD1_2: D1.2 D1.9 D1.13 D3.2 D6.3 D6.4 D6.10 | length 85
  Top Layer w0.25: v1(544.9,64.2) 545.974,64.2 546.174,64 547.1,64 548.01,64.91 D6.10 ; v1(545.5,59.5) 545.485,59.515 545.485,61.635 D6.3 D6.4 ; v1(557.4,59.3) 557.45,59.25 562.65,59.25 v1(562.7,59.2) ; v1(572.4,54.8) 576.4,54.8 v1(577.2,55.6) 577.095,55.705 575.805,55.705 575.26,56.25 D3.2 ; v1(585.4,59.4) 586.8,59.4 591.4,54.8 591.815,54.8 592.99,55.975 D1.2 D1.13 592.945,61.895 592.945,63.355 v1(592.9,63.4) ; v1(596.5,63.3) 596.605,63.195 597.15,63.195 598.07,62.275 D1.9
  Bottom Layer w0.25: v1(544.9,64.2) 544.9,60.1 v1(545.5,59.5) 553.1,59.5 554.3,58.3 556.4,58.3 v1(557.4,59.3) ; v1(562.7,59.2) 562.7,59.077 563.186,58.59 563.186,58.414 566.8,54.8 v1(572.4,54.8) ; v1(577.2,55.6) 581.6,55.6 v1(585.4,59.4) ; v1(592.9,63.4) 592.95,63.35 596.45,63.35 v1(596.5,63.3)
NetD2_7: D2.7 D3.8 | length 76.5
  Top Layer w0.25: v1(581.5,64.4) 581.555,64.345 581.555,62.18 D3.8 ; D2.7 583.975,102.25 590.1,96.125 590.1,96.046 590.246,95.9 597.4,95.9 v1(599.4,93.9)
  Bottom Layer w0.25: v1(581.5,64.4) 576.346,64.4 576.1,64.646 576.1,66.4 576.7,67 594.5,67 595.5,68 595.5,73.5 599.4,77.4 v1(599.4,93.9)
NetD3_4: D3.4 D3.10 D6.12 D6.13 D9.14 | length 95.5
  Top Layer w0.25: v1(547.1,65.4) 546.995,65.505 546.64,65.505 545.47,66.675 D6.12 D6.13 544.2,68.854 544.346,69 546.6,69 555.9,78.3 555.9,82.2 559,85.3 559,85.335 562.97,89.305 D9.14 ; v1(555.4,65.1) 565.5,65.1 566.9,66.5 570,66.5 570,64.146 569.854,64 567.9,64 567.5,63.6 567.5,61.6 564.675,58.775 564.675,58.075 v1(564.6,58) ; v1(571.9,58.3) 573.1,59.5 577.054,59.5 577.2,59.354 577.2,57.7 D3.4@577.8,57.1 ; D3.4 D3.4@577.8,57.1 ; D3.10 579.07,61.7 577.8,60.43 D3.4@577.8,57.1
  Bottom Layer w0.25: v1(547.1,65.4) 547.223,65.4 547.71,64.914 548.886,64.914 551.4,62.4 552,62.4 554.625,65.025 555.325,65.025 v1(555.4,65.1) ; v1(564.6,58) 564.6,57.9 564.8,57.7 571.3,57.7 v1(571.9,58.3)
NetD3_5: D3.5 D3.9 D6.2 XP2.3 | length 195.8
  Top Layer w0.25: XP2.3 XP2.3@445.8,76.4 ; v1(492.76,76.66) 495.08,76.66 495.34,76.4 497.04,78.1 499.6,78.1 v1(499.7,78) ; v1(541.9,60.1) 543.8,60.1 544.2,60.5 D6.2 544.2,63.054 544.346,63.2 551.5,63.2 554.7,60 555.1,60 555.8,59.3 555.8,59 555.7,58.9 555.7,56.1 562.8,49 572.654,49 572.8,49.146 572.8,51.1 572.6,51.3 569.8,51.3 v1(568.4,52.7) ; v1(572.9,52.8) 573,52.7 575.3,52.7 578.5,55.9 578.5,59.2 579.6,60.3 579.6,61.979 579.746,62.125 D3.9 580.34,58.37 579.07,57.1 D3.5
  Layer 2 w0.25: XP2.3 v1(492.76,76.66)
  Bottom Layer w0.25: v1(499.7,78) 500.6,78.9 508.5,78.9 510.1,77.3 510.1,72.6 512.196,70.504 512.404,70.504 514.9,73 514.9,77.454 515.046,77.6 519.6,77.6 523.1,74.1 523.1,71.946 523.246,71.8 537.1,71.8 539.6,69.3 539.6,62.4 v1(541.9,60.1) ; v1(568.4,52.7) 568.45,52.75 572.85,52.75 v1(572.9,52.8)
NetD3_6: D3.6 D5.7 | length 41.4
  Top Layer w0.25: D3.6 580.34,57.74 v1(581.8,59.2) ; D5.7 586.25,83.175 587.275,84.2 v1(587.4,84.2)
  Bottom Layer w0.25: v1(581.8,59.2) 579.7,59.2 575.5,63.4 575.5,67.3 576.6,68.4 580.9,68.4 587.4,74.9 v1(587.4,84.2)
NetD4_12: D4.12 D6.1 | length 27.4
  Top Layer w0.25: D6.1 542.93,62.73 543.8,63.6 547.4,63.6 548.6,64.8 548.6,68.5 549.1,69 v1(553.1,69) ; v1(561.2,70.1) 561.835,69.465 D4.12
  Bottom Layer w0.25: v1(553.1,69) 553.121,69 553.521,68.6 559.7,68.6 v1(561.2,70.1)
NetD4_14: D4.14 D8.11 D9.1 | length 53.6
  Top Layer w0.25: v1(545.4,87.2) 546.23,87.2 546.425,87.395 547.52,87.395 D8.11 ; v1(545.5,91.9) 545.527,91.873 554.082,91.873 D9.1 558.155,91.845 v1(558.3,91.7) ; v1(559.2,65.7) 559.247,65.748 559.247,67.777 D4.14 ; v1(561.3,81.3) 562.951,81.3 563.151,81.1 v1(563.3,81.1) ; v1(562.3,70.1) 562.35,70.15 562.35,77.55 v1(562.4,77.6)
  Bottom Layer w0.25: v1(545.4,87.2) 545.45,87.25 545.45,91.85 v1(545.5,91.9) ; v1(558.3,91.7) 559.6,91.7 561.3,90 v1(561.3,81.3) ; v1(559.2,65.7) 562.3,68.8 v1(562.3,70.1) ; v1(562.4,77.6) 562.4,77.8 562.5,77.9 562.5,80.3 v1(563.3,81.1)
NetD5_1: D5.1 R4.2 | length 8.5
  Top Layer w0.25: D5.1 585.825,75.584 R4.2@591.848,69.561
NetD5_2: D5.2 R3.2 | length 6.8
  Top Layer w0.25: D5.2 586.25,76.825 587.175,75.9 R3.2
NetD5_3: D5.3 R2.2 | length 8.3
  Top Layer w0.25: D5.3 587.17,78.095 592.05,82.975 R2.2
NetD5_4: D5.4 R1.2 | length 13.6
  Top Layer w0.25: D5.4 586.965,79.365 590.4,82.8 590.4,87.925 592.15,89.675 R1.2
NetD5_12: D5.12 R8.2 | length 14.1
  Top Layer w0.25: R8.2 v1(573.4,89) ; v1(578.3,80.7) 578.333,80.667 580.343,80.667 D5.12
  Bottom Layer w0.25: v1(573.4,89) 573.4,85.6 v1(578.3,80.7)
NetD5_13: D5.13 R7.2 | length 13.1
  Top Layer w0.25: R7.2 572.25,70.625 578.5,76.875 578.5,79.219 578.646,79.365 D5.13
NetD5_14: D5.14 R6.2 | length 12.4
  Top Layer w0.25: R6.2 571.95,83.4 v1(573.5,83.4) ; v1(579.1,78.2) 579.152,78.148 580.322,78.148 D5.14
  Bottom Layer w0.25: v1(573.5,83.4) 573.5,80.8 576.1,78.2 v1(579.1,78.2)
NetD5_15: D5.15 R5.2 | length 8.8
  Top Layer w0.25: R5.2 572.25,76.8 v1(576.9,76.8) ; v1(578.9,76.2) 579.005,76.305 579.43,76.305 579.95,76.825 D5.15
  Bottom Layer w0.25: v1(576.9,76.8) 577.006,76.8 577.606,76.2 v1(578.9,76.2)
NetD6_11: D6.11 D7.14 | length 27.4
  Top Layer w0.25: v1(526.8,77) 526.848,77.048 526.848,79.077 D7.14 ; v1(544.2,71.2) 544.305,71.095 544.305,70.695 v1(545.4,69.6) ; v1(545.8,68.4) 545.832,68.4 546.74,67.492 D6.11
  Bottom Layer w0.25: v1(526.8,77) 532.239,77 532.401,77.162 537.691,77.162 537.8,77.054 537.8,76.9 543.425,71.275 544.125,71.275 v1(544.2,71.2) ; v1(545.4,69.6) 545.4,69.451 545.695,69.156 545.695,68.505 v1(545.8,68.4)
NetD7_3: D7.3 R9.1 | length 9.7
  Top Layer w0.25: R9.1 521.825,66.1 522.125,66.4 522.125,66.425 526.895,71.195 D7.3
NetD7_4: D7.4 R10.1 | length 9.9
  Top Layer w0.25: R10.1 527.825,65.75 528.125,66.05 528.125,66.075 530.3,68.25 530.3,70.6 528.325,72.575 528.325,73.515 D7.4
NetD7_5: D7.5 R12.1 | length 11.7
  Top Layer w0.25: D7.5 529.435,73.471 529.26,73.296 529.204,73.296 530.4,72.1 531.354,72.1 531.5,71.954 531.5,66.2 532.3,65.4 R12.1
NetD7_9: D7.9 R13.1 | length 10.3
  Top Layer w0.25: R13.1@527.825,85.75 R13.1 527.85,85.8 v1(530,85.8) ; D7.9 533.272,79.152 533.272,80.573 v1(533.3,80.6)
  Bottom Layer w0.25: v1(530,85.8) 533.3,82.5 v1(533.3,80.6)
NetD7_10: D7.10 R11.1 | length 17.5
  Top Layer w0.25: D7.10 531.975,77.725 532.646,77.054 532.854,77.054 534.8,79 534.9,79 v1(535.6,79.7) ; R11.1 535.1,85.8 538.4,85.8 538.6,85.6 538.6,82.9 v1(537.5,81.8)
  Bottom Layer w0.25: v1(535.6,79.7) 535.6,79.8 537.5,81.7 v1(537.5,81.8)
NetD7_12: D7.12 R14.1 | length 11.7
  Top Layer w0.25: R14.1 521.8,84.9 v1(522.6,84.1) ; v1(529.4,80.5) 529.418,80.483 529.418,79.142 D7.12
  Bottom Layer w0.25: v1(522.6,84.1) 526.2,80.5 v1(529.4,80.5)
NetD8_3: D8.3 D8.4 D8.5 | length 2.5
  Top Layer w0.25: D8.5 D8.4 D8.3
NetD8_8: D8.8 D8.12 D8.13 R15.2 | length 25.6
  Top Layer w0.25: v1(544.7,88.7) 544.715,88.685 547.51,88.685 D8.12 D8.13 547.545,89.92 549.48,89.92 v1(549.5,89.9) ; v1(545,84.2) 545.61,83.59 D8.8 ; R15.2 549.4,99.4 v1(550.5,98.3)
  Bottom Layer w0.25: v1(544.7,88.7) 544.7,86.547 545,86.247 v1(545,84.2) ; v1(549.5,89.9) 549.5,97.3 v1(550.5,98.3)
NetD9_6: D9.6 D9.9 | length 16.6
  Top Layer w0.25: D9.6 554.63,85.495 558.1,88.965 558.1,89 v1(558.5,89.4) ; v1(560,83.3) 560.149,83.3 560.494,82.955 D9.9
  Bottom Layer w0.25: v1(558.5,89.4) 558.5,84.4 559.4,83.5 559.651,83.5 559.851,83.3 v1(560,83.3)
NetR9_2: R9.2 VD1.A | length 15.6
  Top Layer w0.25: VD1.A 513.26,58.86 521.475,67.075 521.475,67.1 521.775,67.4 R9.2
NetR10_2: R10.2 VD2.A | length 13.4
  Top Layer w0.25: VD2.A 523.53,62.805 527.775,67.05 R10.2
NetR11_2: R11.2 VD3.A | length 9.2
  Top Layer w0.25: VD3.A 534.26,87.915 534.775,87.4 R11.2
NetR12_2: R12.2 VD4.A | length 15.5
  Top Layer w0.25: VD4.A 533.53,63.23 535.8,65.5 535.8,67.5 535.654,67.646 535.446,67.646 534.5,66.7 R12.2
NetR13_2: R13.2 VD5.A | length 10.7
  Top Layer w0.25: VD5.A 524.53,90.295 527.775,87.05 R13.2
NetR14_2: R14.2 VD6.A | length 12.4
  Top Layer w0.25: VD6.A 514.53,94.295 521.775,87.05 R14.2
NetR16_2: R16.2 VD7.C | length 5
  Top Layer w0.25: VD7.C 505.64,97.7 R16.2
ON/OFF: D8.2 XP2.1 | length 106.5
  Top Layer w0.25: XP2.1 XP2.1@445.8,73.86 ; v1(491.72,74.12) 495.08,74.12 495.34,73.86 497.88,76.4 501.8,76.4 v1(502.4,75.8) ; v1(505.3,75.8) 508.1,78.6 519.2,78.6 523.7,83.1 525.4,84.8 v1(537,84.8) ; v1(538.5,88.4) 538.5,90.1 538.66,89.94 D8.2
  Layer 2 w0.25: XP2.1 v1(491.72,74.12)
  Bottom Layer w0.25: v1(502.4,75.8) v1(505.3,75.8) ; v1(537,84.8) 538.5,86.3 v1(538.5,88.4)
Out1_N: D2.6 XP1.2 | length 31.2
  Top Layer w0.3: D2.6 582.705,102.25 582.555,102.1 582.546,102.1 582.37,101.924 582.37,101.6 589.954,94.016 595.822,94.016 603.83,86.009 603.83,85.18 604.45,84.56 XP1.2
Out1_P: D2.5 XP1.1 | length 31
  Top Layer w0.3: D2.5 581.435,102.25 581.585,102.1 581.594,102.1 581.77,101.924 581.77,101.351 589.705,93.416 595.574,93.416 603.23,85.76 603.23,85.436 603.054,85.26 602.96,85.26 XP1.1
Out2_N: D5.6 XP1.10 | length 31.4
  Top Layer w0.3: D5.6 586.25,81.905 586.742,82.397 587.701,82.397 588.503,83.2 v1(588.6,83.2) ; v1(589.9,72.3) 589.996,72.396 590.321,72.396 590.326,72.4 602.947,72.4 603.83,73.283 603.83,73.78 604.45,74.4 XP1.10
  Bottom Layer w0.3: v1(588.6,83.2) 588.696,83.104 588.696,82.779 588.7,82.774 588.7,80.481 588.8,80.381 588.8,78.169 588.374,77.743 588.374,73.34 589.319,72.396 589.804,72.396 v1(589.9,72.3)
Out2_P: D5.5 XP1.9 | length 30.9
  Top Layer w0.3: D5.5 586.25,80.635 587.176,81.561 587.176,81.797 588.046,81.797 589.4,83.151 v1(589.4,83.2) ; v1(589.9,73.1) 589.996,73.004 590.321,73.004 590.326,73 602.698,73 603.23,73.532 603.23,73.78 602.61,74.4 XP1.9
  Bottom Layer w0.3: v1(589.4,83.2) 589.304,83.104 589.304,82.779 589.3,82.774 589.3,80.73 589.4,80.63 589.4,77.92 588.974,77.495 588.974,73.588 589.367,73.196 589.804,73.196 v1(589.9,73.1)
Reset: D4.15 D7.15 D9.7 D9.15 XP2.2 | length 171.1
  Top Layer w0.25: XP2.2@442.9,74.02 XP2.2 ; v1(493.6,71.6) 495.3,71.6 v1(497.1,73.4) ; v1(503.8,77.1) 506.6,79.9 v1(512.7,79.9) ; v1(514.4,83.8) 515.8,82.4 521.8,82.4 v1(524.1,84.7) ; v1(525.6,83.2) 525.612,83.188 525.612,79.137 D7.15 525.625,80.679 526.346,81.4 535.7,81.4 543.3,73.8 547.7,73.8 551.9,78 v1(552.8,78) 552.1,78.7 552.1,84 552.325,84.225 D9.7 554.63,84.225 560.98,90.575 D9.15 ; v1(551.7,73.2) 551.748,73.152 551.748,72.652 555.1,69.3 v1(555.1,67.1) ; v1(558,65.8) 558.012,65.812 558.012,67.812 D4.15
  Layer 2 w0.25: XP2.2 443,71.746 443.146,71.6 v1(493.6,71.6)
  Bottom Layer w0.25: v1(497.1,73.4) 497.2,73.5 497.2,73.7 498.1,74.6 501.354,74.6 501.5,74.746 501.5,75.9 502.2,76.6 503.204,76.6 503.704,77.1 v1(503.8,77.1) ; v1(512.7,79.9) 512.7,82.1 v1(514.4,83.8) ; v1(524.1,84.7) v1(525.6,83.2) ; v1(551.7,73.2) 552.8,74.3 v1(552.8,78) ; v1(555.1,67.1) 556.4,65.8 v1(558,65.8)
S0: D2.11 D9.3 | length 41.9
  Top Layer w0.25: D9.3 555.456,89.305 555.851,89.7 v1(556,89.7) ; v1(573.7,105.3) 573.8,105.3 573.9,105.2 575,105.2 575.5,105.7 580.9,105.7 581.2,106 581.2,106.195 582.705,107.7 D2.11
  Bottom Layer w0.25: v1(556,89.7) 556,94.8 556.3,95.1 558.6,95.1 559.3,95.8 559.3,99.3 565.3,105.3 v1(573.7,105.3)
S1: D2.10 D9.4 | length 78.6
  Top Layer w0.25: v1(552.5,87.1) 552.605,87.205 552.76,87.205 553.59,88.035 D9.4 ; v1(581.7,105.7) 581.734,105.666 581.941,105.666 583.975,107.7 D2.10
  Bottom Layer w0.25: v1(552.5,87.1) 553.7,85.9 553.7,80.9 554.6,80 555.7,80 556.2,80.5 561.954,80.5 562.1,80.646 562.1,91.6 565.4,94.9 566.6,94.9 570,91.5 581.3,91.5 590.6,100.8 590.6,101.254 590.454,101.4 586,101.4 v1(581.7,105.7)
S2: D2.9 D9.5 | length 54.9
  Top Layer w0.25: D9.5 554.63,86.765 555.165,87.3 555.3,87.3 560.9,92.9 v1(560.9,97.4) ; D2.9 585.245,108.525 585.42,108.7 588.454,108.7 588.6,108.554 v1(588.6,100.3)
  Bottom Layer w0.25: v1(560.9,97.4) 585.7,97.4 v1(588.6,100.3)
S3: D5.11 D9.11 | length 20.4
  Top Layer w0.25: D9.11 563.492,85.497 565.397,85.497 v1(565.4,85.5) ; v1(568.6,80.9) 568.6,80.8 568.9,80.5 573.1,80.5 574.505,81.905 D5.11
  Bottom Layer w0.25: v1(565.4,85.5) 565.4,84.1 v1(568.6,80.9)
S4: D5.10 D9.12 | length 21.1
  Top Layer w0.25: D9.12 563.507,86.783 565.983,86.783 v1(566,86.8) ; v1(569,81.8) 569.096,81.8 569.596,81.3 572.5,81.3 574.375,83.175 D5.10
  Bottom Layer w0.25: v1(566,86.8) 566,84.8 v1(569,81.8)
S5: D5.9 D9.13 | length 18.4
  Top Layer w0.25: D9.13 563.522,88.067 565.967,88.067 v1(566,88.1) ; v1(570,87.3) 572.855,84.445 D5.9
  Bottom Layer w0.25: v1(566,88.1) 569.2,88.1 v1(570,87.3)
STROB0: D1.1 D4.3 | length 49.3
  Top Layer w0.25: D4.3 559.149,62.521 559.149,63.475 559,63.624 559,64.154 559.146,64.3 v1(560.9,64.3) ; v1(567.3,71.7) 570.5,68.5 570.5,67.9 573.4,65 585.3,65 v1(585.4,64.9) ; v1(587.8,62.1) 587.651,62.1 587.251,61.7 v1(586,61.7) 590.896,56.804 591.558,56.804 591.72,56.642 D1.1
  Bottom Layer w0.25: v1@561.202,64.3 v1(560.9,64.3) 560.9,65.3 v1(567.3,71.7) ; v1(585.4,64.9) 585.505,64.795 585.505,64.395 v1(587.8,62.1)
STROB1: D4.2 D6.5 | length 14.1
  Top Layer w0.25: v1(548,60.2) 548.005,60.205 548.005,61.645 D6.5 ; v1(555.4,63.4) 556.2,64.2 556.625,64.2 558.025,62.8 D4.2
  Bottom Layer w0.25: v1(548,60.2) 551.1,60.2 554.3,63.4 v1(555.4,63.4)
STROB2: D1.10 D4.4 | length 50.5
  Top Layer w0.25: D4.4 560.565,60.484 560.9,60.149 v1(560.9,60) ; v1(585.6,53.4) 586.6,52.4 595.2,52.4 597.3,54.5 597.3,60.925 596.8,61.425 D1.10
  Bottom Layer w0.25: v1(560.9,60) 560.9,59.9 567.4,53.4 v1(585.6,53.4)
STROB3: D3.12 D4.7 | length 18.7
  Top Layer w0.25: D4.7 564.387,62.362 564.387,60.313 v1(564.4,60.3) ; v1(566.1,59.1) 568.6,61.6 568.6,62.2 569.4,62.2 v1(570.5,63.3) ; v1(575.7,60.8) 575.7,60.835 576.53,61.665 D3.12
  Bottom Layer w0.25: v1(564.4,60.3) 564.505,60.195 565.005,60.195 v1(566.1,59.1) ; v1(570.5,63.3) 573,60.8 v1(575.7,60.8)
STROB4: D3.1 D4.10 | length 23.1
  Top Layer w0.25: v1(564.3,66.2) 564.337,66.238 564.337,67.787 D4.10 ; v1(565.9,57) 566.713,57.813 566.713,58.213 v1(567.6,59.1) ; v1(572.4,55.8) 572.975,56.375 573.828,56.375 573.99,56.537 D3.1
  Bottom Layer w0.25: v1(564.3,66.2) 566.3,66.2 566.7,65.8 566.7,60 v1(567.6,59.1) ; v1(565.9,57) 567.1,55.8 v1(572.4,55.8)
STROB5: D1.4 D4.1 | length 68.8
  Top Layer w0.25: v1(554.8,58.9) 554.8,56.3 564.6,46.5 599.554,46.5 599.7,46.646 599.7,51.9 v1(599.1,52.5) ; v1(556.4,60.7) 556.4,60.849 556.755,61.204 D4.1 ; v1(595.5,54.2) 595.515,54.215 595.515,56.385 D1.4
  Bottom Layer w0.25: v1(554.8,58.9) 555.559,59.659 556.059,59.659 556.325,59.925 556.325,60.625 v1(556.4,60.7) ; v1(595.5,54.2) 597.2,52.5 v1(599.1,52.5)
STROB6: D1.12 D4.5 | length 38.6
  Top Layer w0.25: D4.5 561.835,64.335 562.2,64.7 v1(568.7,64.7) ; v1(572.4,66.8) 573.5,65.7 592.3,65.7 594.26,63.74 D1.12
  Bottom Layer w0.25: v1(568.7,64.7) 570.3,64.7 v1(572.4,66.8)
STROB7: D4.6 D6.9 | length 21.6
  Top Layer w0.25: D6.9 549.28,68.254 549.426,68.4 552.054,68.4 552.874,67.579 552.874,62.926 v1(553.8,62) ; v1(561.7,61) 561.805,61.105 562.26,61.105 563.105,61.95 D4.6
  Bottom Layer w0.25: v1(553.8,62) 553.896,62 554.396,61.5 556.7,61.5 557.2,61 v1(561.7,61)
pads on no net: D4.9 D4.11 D7.1 D7.2 D7.6 D7.7 D7.11 XP2.4 XP2.5 XP2.6

## Silkscreen, mask and mechanical layers (free items; w line width, h text height)
Mechanical 5:
  text "CA010M0010REB-0405" at 582.8,99.4 h1.52